# Altium PCB PCB_Clavier.PcbDoc (part 1 of 2)
Units mm, origin at the board's own origin, x right, y up, seen from the top; angles counter-clockwise.
Board outline 291.65 x 101.75 mm, 2 copper layers (Top Layer, Bottom Layer), stack 1.569 mm thick; 306 components, 204 nets, 1059 pads, 0 vias.
Unrouted connection lines stored in the file: 593.
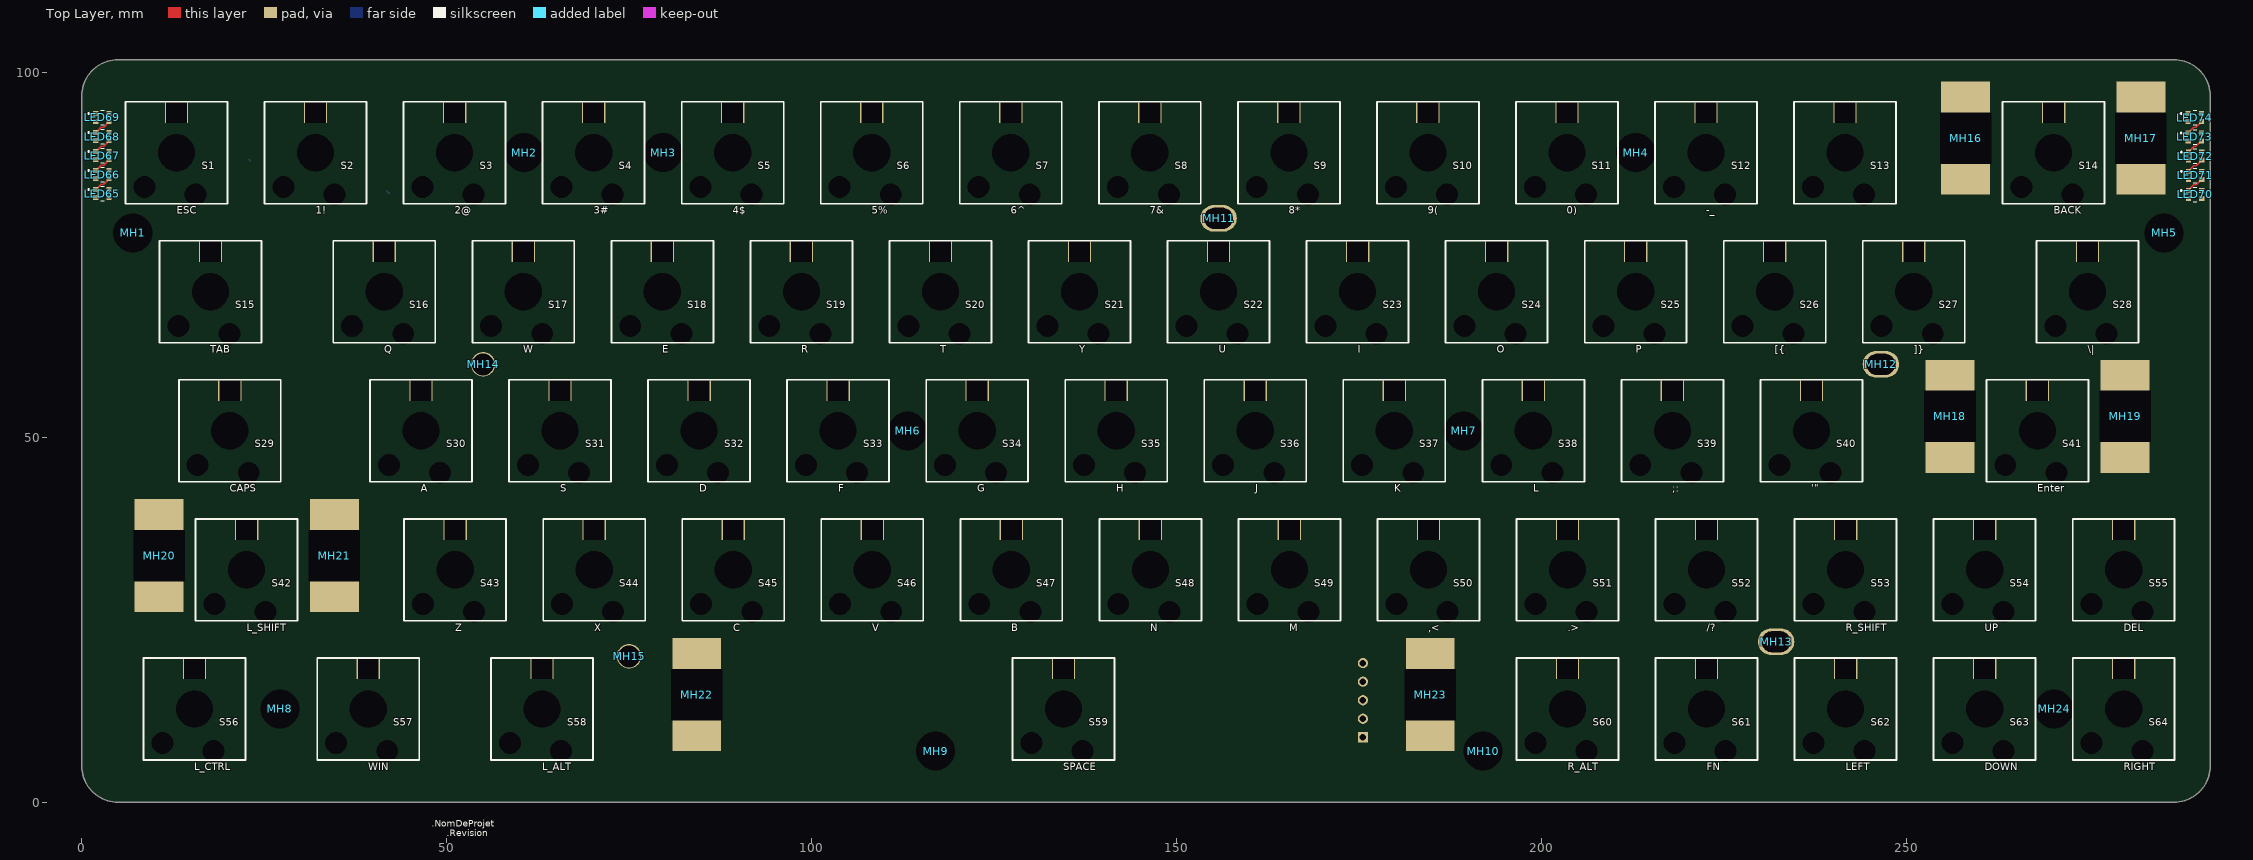
[diagram p0: Top Layer view]
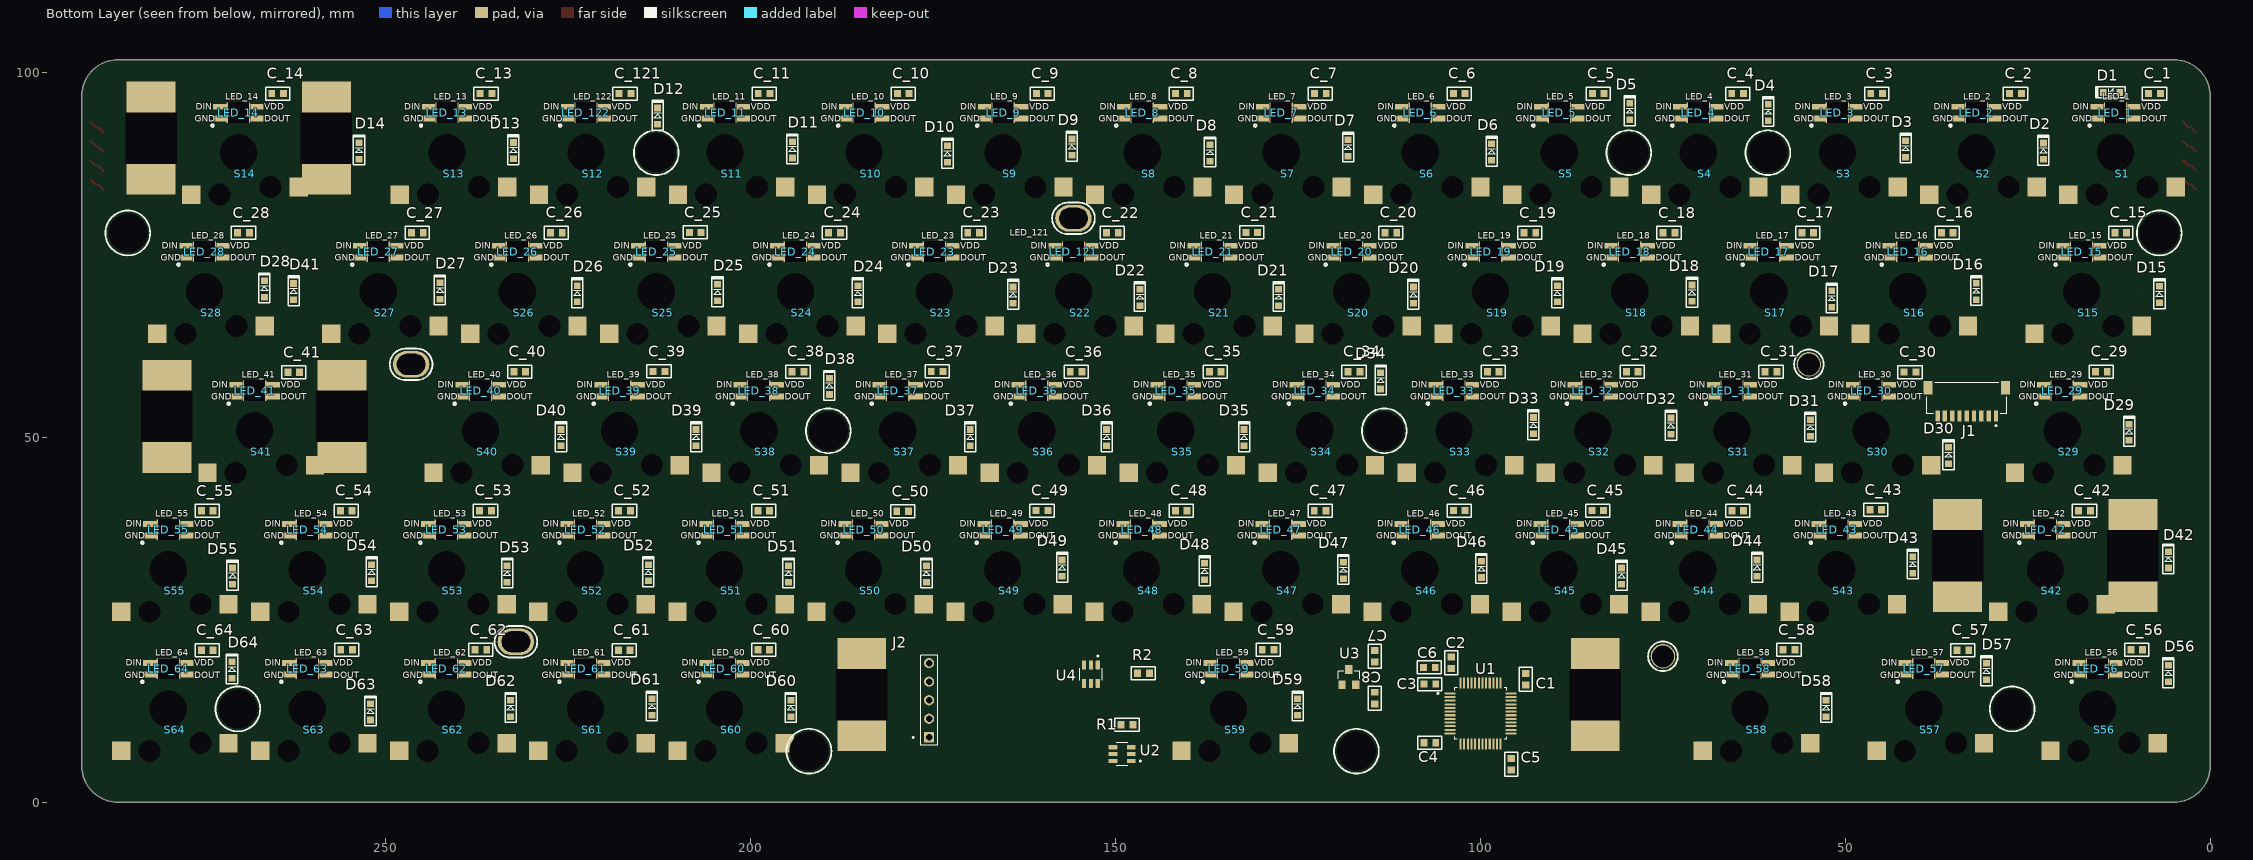
[diagram p1: Bottom Layer view, seen from below]

## Layer stack, top to bottom
Top Solder: solder mask 0.0254, SM-001, Dk 4
Top Layer: signal copper 0.035
Dielectric 1: core 1.4986, Core-043, Dk 4.3
Bottom Layer: signal copper 0.035
Bottom Solder: solder mask 0.0254, SM-001, Dk 4

## Board outline
5,0 cw(c5,5) 0,5 0,96.75 cw(c5,96.75) 5,101.75 286.65,101.75 cw(c286.65,96.75) 291.65,96.75 291.65,5 cw(c286.65,5) 286.65,0

## Design rules (kind name [scope] priority, off if disabled: settings)
BoardOutlineClearance [All] p1: gap=1 ignorepadtopadclearanceinfootprint=FALSE
Clearance [All] p1: gap=0.2 ignorepadtopadclearanceinfootprint=FALSE
DiffPairsRouting [All] p1: maxlimit=0.125 minlimit=0.125 mostfreqgap=0.125 toplayer_minwidth=0.125 toplayer_maxwidth=0.125 toplayer_prefwidth=0.125 bottomlayer_minwidth=0.125 bottomlayer_maxwidth=0.125 bottomlayer_prefwidth=0.125 maxuncoupledlength=15
HoleSize [All] p1: absolutevalues=TRUE maxlimit=5 minlimit=0.2 maxpercent=80.000 minpercent=20.000
HoleToHoleClearance [All] p1: gap=0.3 allowstackedmicrovias=TRUE
MinimumSolderMaskSliver [All] p1: minsoldermaskwidth=0.075
PlaneClearance [All] p1: clearance=0.5
PlaneConnect [All] p1: pad.planeconnectstyle=Relief pad.reliefexpansion=0.508 pad.reliefentries=4 pad.reliefconductorwidth=0.254 pad.reliefairgap=0.254 via.planeconnectstyle=Direct via.reliefexpansion=0.508 via.reliefentries=4 via.reliefconductorwidth=0.254 via.reliefairgap=0.254
PolygonConnect [All] p1: thpad.connectstyle=Relief thpad.reliefconductorwidth=0.254 thpad.reliefentries=4 thpad.polygonreliefangle="90 Angle" thpad.airgapwidth=0.254 smdpad.connectstyle=Relief smdpad.reliefconductorwidth=0.254 smdpad.reliefentries=4 smdpad.polygonreliefangle="90 Angle" smdpad.airgapwidth=0.254 via.connectstyle=Direct via.reliefconductorwidth=0.254 via.reliefentries=4 via.polygonreliefangle="90 Angle" via.airgapwidth=0.254
RoutingVias [All] p1: holewidth=0.3 width=0.8 viastyle="Through Hole" minholewidth=0.2 minwidth=0.6 maxholewidth=0.7 maxwidth=1.2
SilkToSilkClearance [All] p1: silktosilkclearance=0
SilkToSolderMaskClearance [IsPad] p1: minsilkscreentomaskgap=0 clearancetoexposedcopper=TRUE
SolderMaskExpansion [All] p1: expansion=0.102 istentingtop=FALSE
SupplyNets "Schematic Supply Nets_2" [InNet('GND')] p1: voltage=0.000
SupplyNets "Schematic Supply Nets_1" [InNet('VBUS')] p2: voltage=0.000
SupplyNets "Schematic Supply Nets" [InNet('+3.3V')] p3: voltage=0.000
Width [All] p1: maxlimit=5 minlimit=0.15 preferedwidth=0.2
22 further rules are at their usual default settings.

## Classes and differential pairs
component class U_LEDS_Status: LED65 LED66 LED67 LED68 LED69 LED70 LED71 LED72 LED73 LED74
component class 121: C_121 LED_121
component class 64: C_64 LED_64
component class 62: C_62 LED_62
component class 55: C_55 LED_55
component class 53: C_53 LED_53
component class 51: C_51 LED_51
component class 49: C_49 LED_49
component class 47: C_47 LED_47
component class 46: C_46 LED_46
component class 45: C_45 LED_45
component class 44: C_44 LED_44
component class 43: C_43 LED_43
component class 42: C_42 LED_42
component class 37: C_37 LED_37
component class 35: C_35 LED_35
component class 33: C_33 LED_33
component class 32: C_32 LED_32
component class 31: C_31 LED_31
component class 30: C_30 LED_30
component class 29: C_29 LED_29
component class 28: C_28 LED_28
component class 27: C_27 LED_27
component class 25: C_25 LED_25
component class 24: C_24 LED_24
component class 23: C_23 LED_23
component class 21: C_21 LED_21
component class 17: C_17 LED_17
component class 15: C_15 LED_15
component class 13: C_13 LED_13
component class 11: C_11 LED_11
component class 10: C_10 LED_10
component class 9: C_9 LED_9
component class 8: C_8 LED_8
component class 7: C_7 LED_7
component class 6: C_6 LED_6
component class 5: C_5 LED_5
component class 4: C_4 LED_4
component class 3: C_3 LED_3
component class 1: C_1 LED_1
channel class LED_Channel: 1 2 3 4 5 6 7 8 9 10 11 13 14 15 16 17 18 19 20 21 23 24 25 26 27 28 29 30 31 32 33 34 35 36 37 38 39 40 41 42 43 44 45 46 47 48 49 50 51 52 53 54 55 56 57 58 59 60 61 62 63 64 121 122
component class U_Mounting_Holes: MH1 MH2 MH3 MH4 MH5 MH6 MH7 MH8 MH9 MH10 MH11 MH12 MH13 MH14 MH15 MH16 MH17 MH18 MH19 MH20 MH21 MH22 MH23 MH24
component class U_MCU: C1 C2 C3 C4 C5 C6 C7 C8 J1 J2 R1 R2 U1 U2 U3 U4
component class U_Matrice: D1 D2 D3 D4 D5 D6 D7 D8 D9 D10 D11 D12 D13 D14 D15 D16 D17 D18 D19 D20 D21 D22 D23 D24 D25 D26 D27 D28 D29 D30 D31 D32 D33 D34 D35 D36 D37 D38 D39 D40 D41 D42 D43 D44 D45 D46 D47 D48 D49 D50 D51 D52 D53 D54 D55 D56 D57 D58 D59 D60 D61 D62 D63 D64 S1 S2 S3 S4 S5 S6 S7 S8 S9 S10 S11 S12 S13 S14 S15 S16 S17 S18 S19 S20 S21 S22 S23 S24 S25 S26 S27 S28 S29 S30 S31 S32 S33 S34 S35 S36 S37 S38 S39 S40 S41 S42 S43 S44 S45 S46 S47 S48 S49 S50 S51 S52 S53 S54 S55 S56 S57 S58 S59 S60 S61 S62 S63 S64
component class 18: C_18 LED_18
component class 48: C_48 LED_48
component class 41: C_41 LED_41
component class 26: C_26 LED_26
component class 19: C_19 LED_19
component class 14: C_14 LED_14
component class 40: C_40 LED_40
component class 61: C_61 LED_61
component class 50: C_50 LED_50
component class 39: C_39 LED_39
component class 60: C_60 LED_60
component class 57: C_57 LED_57
component class 16: C_16 LED_16
component class 59: C_59 LED_59
component class 52: C_52 LED_52
component class 63: C_63 LED_63
component class 58: C_58 LED_58
component class 36: C_36 LED_36
component class 54: C_54 LED_54
component class 38: C_38 LED_38
component class 56: C_56 LED_56
component class 20: C_20 LED_20
component class 34: C_34 LED_34
component class 122: C_22 LED_122
component class 2: C_2 LED_2
differential pair USBD: +USBD_- -USBD_+

## Components (designator, comment, footprint, x,y, rotation, side; value= is the part's Value field where it differs from the comment)
C1 "100nF" 0603-CAPS 93.8,16.85 r90 bottom
C2 "100nF" 0603-CAPS 104,19.125 r90 bottom
C3 "100nF" 0603-CAPS 106.925,16.2 r0 bottom
C4 "100nF" 0603-CAPS 106.925,8.175 r0 bottom
C5 "100nF" 0603-CAPS 95.8,5.225 r270 bottom
C6 "10uF" 0603-CAPS 107,18.475 r0 bottom
C7 "1uF" 0603-CAPS 114.475,20.025 r90 bottom
C8 "1uF" 0603-CAPS 114.5,14.275 r270 bottom
C_1 "100nF" 0603-CAPS 7.65,97.1 r180 bottom (schematic designator C)
C_2 "100nF" 0603-CAPS 26.7,97.1 r180 bottom (schematic designator C)
C_3 "100nF" 0603-CAPS 45.725,97.1 r180 bottom (schematic designator C)
C_4 "100nF" 0603-CAPS 64.775,97.1 r180 bottom (schematic designator C)
C_5 "100nF" 0603-CAPS 83.85,97.1 r180 bottom (schematic designator C)
C_6 "100nF" 0603-CAPS 102.925,97.1 r180 bottom (schematic designator C)
C_7 "100nF" 0603-CAPS 121.925,97.1 r180 bottom (schematic designator C)
C_8 "100nF" 0603-CAPS 140.975,97.1 r180 bottom (schematic designator C)
C_9 "100nF" 0603-CAPS 160.05,97.1 r180 bottom (schematic designator C)
C_10 "100nF" 0603-CAPS 179.075,97.1 r180 bottom (schematic designator C)
C_11 "100nF" 0603-CAPS 198.15,97.1 r180 bottom (schematic designator C)
C_13 "100nF" 0603-CAPS 236.25,97.1 r180 bottom (schematic designator C)
C_14 "100nF" 0603-CAPS 264.8,97.1 r180 bottom (schematic designator C)
C_15 "100nF" 0603-CAPS 12.275,78.05 r180 bottom (schematic designator C)
C_16 "100nF" 0603-CAPS 36.05,78.05 r180 bottom (schematic designator C)
C_17 "100nF" 0603-CAPS 55.15,78.05 r180 bottom (schematic designator C)
C_18 "100nF" 0603-CAPS 74.175,78.025 r180 bottom (schematic designator C)
C_19 "100nF" 0603-CAPS 93.225,78.025 r180 bottom (schematic designator C)
C_20 "100nF" 0603-CAPS 112.275,78.05 r180 bottom (schematic designator C)
C_21 "100nF" 0603-CAPS 131.35,78.075 r180 bottom (schematic designator C)
C_22 "100nF" 0603-CAPS 150.425,78.025 r180 bottom (schematic designator C)
C_23 "100nF" 0603-CAPS 169.45,78.05 r180 bottom (schematic designator C)
C_24 "100nF" 0603-CAPS 188.5,78.05 r180 bottom (schematic designator C)
C_25 "100nF" 0603-CAPS 207.575,78.075 r180 bottom (schematic designator C)
C_26 "100nF" 0603-CAPS 226.6,78.05 r180 bottom (schematic designator C)
C_27 "100nF" 0603-CAPS 245.65,78.025 r180 bottom (schematic designator C)
C_28 "100nF" 0603-CAPS 269.475,78.025 r180 bottom (schematic designator C)
C_29 "100nF" 0603-CAPS 14.925,59 r180 bottom (schematic designator C)
C_30 "100nF" 0603-CAPS 41.15,58.95 r180 bottom (schematic designator C)
C_31 "100nF" 0603-CAPS 60.2,59 r180 bottom (schematic designator C)
C_32 "100nF" 0603-CAPS 79.2,59 r180 bottom (schematic designator C)
C_33 "100nF" 0603-CAPS 98.25,59 r180 bottom (schematic designator C)
C_34 "100nF" 0603-CAPS 117.325,59 r180 bottom (schematic designator C)
C_35 "100nF" 0603-CAPS 136.35,59 r180 bottom (schematic designator C)
C_36 "100nF" 0603-CAPS 155.4,58.975 r180 bottom (schematic designator C)
C_37 "100nF" 0603-CAPS 174.45,59.025 r180 bottom (schematic designator C)
C_38 "100nF" 0603-CAPS 193.5,59 r180 bottom (schematic designator C)
C_39 "100nF" 0603-CAPS 212.55,59.025 r180 bottom (schematic designator C)
C_40 "100nF" 0603-CAPS 231.625,59 r180 bottom (schematic designator C)
C_41 "100nF" 0603-CAPS 262.575,58.925 r180 bottom (schematic designator C)
C_42 "100nF" 0603-CAPS 17.25,39.95 r180 bottom (schematic designator C)
C_43 "100nF" 0603-CAPS 45.85,40.075 r180 bottom (schematic designator C)
C_44 "100nF" 0603-CAPS 64.75,39.95 r180 bottom (schematic designator C)
C_45 "100nF" 0603-CAPS 83.925,39.975 r180 bottom (schematic designator C)
C_46 "100nF" 0603-CAPS 102.925,39.975 r180 bottom (schematic designator C)
C_47 "100nF" 0603-CAPS 121.975,39.95 r180 bottom (schematic designator C)
C_48 "100nF" 0603-CAPS 141,39.95 r180 bottom (schematic designator C)
C_49 "100nF" 0603-CAPS 160.075,39.975 r180 bottom (schematic designator C)
C_50 "100nF" 0603-CAPS 179.175,39.875 r180 bottom (schematic designator C)
C_51 "100nF" 0603-CAPS 198.2,39.95 r180 bottom (schematic designator C)
C_52 "100nF" 0603-CAPS 217.275,39.95 r180 bottom (schematic designator C)
C_53 "100nF" 0603-CAPS 236.325,39.95 r180 bottom (schematic designator C)
C_54 "100nF" 0603-CAPS 255.4,39.95 r180 bottom (schematic designator C)
C_55 "100nF" 0603-CAPS 274.425,39.925 r180 bottom (schematic designator C)
C_56 "100nF" 0603-CAPS 10.075,20.9 r180 bottom (schematic designator C)
C_57 "100nF" 0603-CAPS 33.9,20.85 r180 bottom (schematic designator C)
C_58 "100nF" 0603-CAPS 57.725,20.9 r180 bottom (schematic designator C)
C_59 "100nF" 0603-CAPS 129.1,20.9 r180 bottom (schematic designator C)
C_60 "100nF" 0603-CAPS 198.2,20.9 r180 bottom (schematic designator C)
C_61 "100nF" 0603-CAPS 217.3,20.85 r180 bottom (schematic designator C)
C_62 "100nF" 0603-CAPS 236.95,20.9 r180 bottom (schematic designator C)
C_63 "100nF" 0603-CAPS 255.35,20.9 r180 bottom (schematic designator C)
C_64 "100nF" 0603-CAPS 274.425,20.85 r180 bottom (schematic designator C)
C_121 "100nF" 0603-CAPS 217.2,97.1 r180 bottom (schematic designator C)
D1 "1N4148W" 1N4148W(SOD123) 13.55,97.275 r0 bottom
D2 "1N4148W" 1N4148W(SOD123) 22.875,89.2 r90 bottom
D3 "1N4148W" 1N4148W(SOD123) 41.75,89.5 r90 bottom
D4 "1N4148W" 1N4148W(SOD123) 60.575,94.5 r90 bottom
D5 "1N4148W" 1N4148W(SOD123) 79.55,94.625 r90 bottom
D6 "1N4148W" 1N4148W(SOD123) 98.475,89.075 r90 bottom
D7 "1N4148W" 1N4148W(SOD123) 118.125,89.65 r90 bottom
D8 "1N4148W" 1N4148W(SOD123) 137.05,88.975 r90 bottom
D9 "1N4148W" 1N4148W(SOD123) 155.975,89.75 r90 bottom
D10 "1N4148W" 1N4148W(SOD123) 173.025,88.8 r90 bottom
D11 "1N4148W" 1N4148W(SOD123) 194.275,89.4 r90 bottom
D12 "1N4148W" 1N4148W(SOD123) 212.725,94 r90 bottom
D13 "1N4148W" 1N4148W(SOD123) 232.5,89.275 r90 bottom
D14 "1N4148W" 1N4148W(SOD123) 253.65,89.25 r90 bottom
D15 "1N4148W" 1N4148W(SOD123) 6.975,69.55 r90 bottom
D16 "1N4148W" 1N4148W(SOD123) 32.075,69.975 r90 bottom
D17 "1N4148W" 1N4148W(SOD123) 51.875,68.95 r90 bottom
D18 "1N4148W" 1N4148W(SOD123) 71.025,69.75 r90 bottom
D19 "1N4148W" 1N4148W(SOD123) 89.45,69.675 r90 bottom
D20 "1N4148W" 1N4148W(SOD123) 109.2,69.475 r90 bottom
D21 "1N4148W" 1N4148W(SOD123) 127.65,69.15 r90 bottom
D22 "1N4148W" 1N4148W(SOD123) 146.675,69.15 r90 bottom
D23 "1N4148W" 1N4148W(SOD123) 164.025,69.475 r90 bottom
D24 "1N4148W" 1N4148W(SOD123) 185.3,69.675 r90 bottom
D25 "1N4148W" 1N4148W(SOD123) 204.525,69.825 r90 bottom
D26 "1N4148W" 1N4148W(SOD123) 223.75,69.675 r90 bottom
D27 "1N4148W" 1N4148W(SOD123) 242.575,70.075 r90 bottom
D28 "1N4148W" 1N4148W(SOD123) 266.625,70.35 r90 bottom
D29 "1N4148W" 1N4148W(SOD123) 11.125,50.7 r90 bottom
D30 "1N4148W" 1N4148W(SOD123) 35.875,47.5 r90 bottom
D31 "1N4148W" 1N4148W(SOD123) 54.8,51.275 r90 bottom
D32 "1N4148W" 1N4148W(SOD123) 73.9,51.525 r90 bottom
D33 "1N4148W" 1N4148W(SOD123) 92.75,51.6 r90 bottom
D34 "1N4148W" 1N4148W(SOD123) 113.675,57.75 r90 bottom
D35 "1N4148W" 1N4148W(SOD123) 132.375,49.95 r90 bottom
D36 "1N4148W" 1N4148W(SOD123) 151.225,49.95 r90 bottom
D37 "1N4148W" 1N4148W(SOD123) 169.9,49.95 r90 bottom
D38 "1N4148W" 1N4148W(SOD123) 189.2,57 r90 bottom
D39 "1N4148W" 1N4148W(SOD123) 207.45,49.95 r90 bottom
D40 "1N4148W" 1N4148W(SOD123) 225.975,49.95 r90 bottom
D41 "1N4148W" 1N4148W(SOD123) 262.6,69.95 r90 bottom locked
D42 "1N4148W" 1N4148W(SOD123) 5.75,33.225 r90 bottom
D43 "1N4148W" 1N4148W(SOD123) 40.775,32.5 r90 bottom
D44 "1N4148W" 1N4148W(SOD123) 62.1,32.075 r90 bottom
D45 "1N4148W" 1N4148W(SOD123) 80.675,30.975 r90 bottom
D46 "1N4148W" 1N4148W(SOD123) 99.875,31.925 r90 bottom
D47 "1N4148W" 1N4148W(SOD123) 118.775,31.775 r90 bottom
D48 "1N4148W" 1N4148W(SOD123) 137.8,31.6 r90 bottom
D49 "1N4148W" 1N4148W(SOD123) 157.325,32.075 r90 bottom
D50 "1N4148W" 1N4148W(SOD123) 175.9,31.3 r90 bottom
D51 "1N4148W" 1N4148W(SOD123) 194.8,31.3 r90 bottom
D52 "1N4148W" 1N4148W(SOD123) 214,31.45 r90 bottom
D53 "1N4148W" 1N4148W(SOD123) 233.35,31.3 r90 bottom
D54 "1N4148W" 1N4148W(SOD123) 251.925,31.45 r90 bottom
D55 "1N4148W" 1N4148W(SOD123) 270.975,30.975 r90 bottom
D56 "1N4148W" 1N4148W(SOD123) 5.75,17.625 r90 bottom
D57 "1N4148W" 1N4148W(SOD123) 30.675,17.9 r90 bottom
D58 "1N4148W" 1N4148W(SOD123) 52.65,12.875 r90 bottom
D59 "1N4148W" 1N4148W(SOD123) 125.05,13.05 r90 bottom
D60 "1N4148W" 1N4148W(SOD123) 194.475,12.875 r90 bottom
D61 "1N4148W" 1N4148W(SOD123) 213.525,13.05 r90 bottom
D62 "1N4148W" 1N4148W(SOD123) 232.875,12.875 r90 bottom
D63 "1N4148W" 1N4148W(SOD123) 252.075,12.4 r90 bottom
D64 "1N4148W" 1N4148W(SOD123) 271.05,18.15 r90 bottom
J1 "SM09B-SRSS-TB(LF)(SN)" JST_SM09B-SRSS-TB(LF)(SN) 33.375,56.8 r0 bottom
J2 "Prog" TE_5-146280-5 175.55,13.985 r90 bottom
LED65 "WS2812-2020" LED_WS2812-2020 2.85,83.4 r180 top
LED66 "WS2812-2020" LED_WS2812-2020 2.85,86 r180 top
LED67 "WS2812-2020" LED_WS2812-2020 2.85,88.6 r180 top
LED68 "WS2812-2020" LED_WS2812-2020 2.85,91.2 r180 top
LED69 "WS2812-2020" LED_WS2812-2020 2.85,93.825 r180 top
LED70 "WS2812-2020" LED_WS2812-2020 289.55,83.275 r180 top
LED71 "WS2812-2020" LED_WS2812-2020 289.55,85.9 r180 top
LED72 "WS2812-2020" LED_WS2812-2020 289.55,88.525 r180 top
LED73 "WS2812-2020" LED_WS2812-2020 289.54,91.175 r180 top
LED74 "WS2812-2020" LED_WS2812-2020 289.525,93.8 r180 top
LED_1 "SK6803 Mini-E" SK6812_LED 13,94.5 r0 top locked (schematic designator LED)
LED_2 "SK6803 Mini-E" SK6812_LED 32.05,94.5 r0 top locked (schematic designator LED)
LED_3 "SK6803 Mini-E" SK6812_LED 51.1,94.5 r0 top locked (schematic designator LED)
LED_4 "SK6803 Mini-E" SK6812_LED 70.15,94.5 r0 top locked (schematic designator LED)
LED_5 "SK6803 Mini-E" SK6812_LED 89.2,94.5 r0 top locked (schematic designator LED)
LED_6 "SK6803 Mini-E" SK6812_LED 108.25,94.5 r0 top locked (schematic designator LED)
LED_7 "SK6803 Mini-E" SK6812_LED 127.3,94.5 r0 top locked (schematic designator LED)
LED_8 "SK6803 Mini-E" SK6812_LED 146.35,94.5 r0 top locked (schematic designator LED)
LED_9 "SK6803 Mini-E" SK6812_LED 165.4,94.5 r0 top locked (schematic designator LED)
LED_10 "SK6803 Mini-E" SK6812_LED 184.45,94.5 r0 top locked (schematic designator LED)
LED_11 "SK6803 Mini-E" SK6812_LED 203.5,94.5 r0 top locked (schematic designator LED)
LED_13 "SK6803 Mini-E" SK6812_LED 241.6,94.5 r0 top locked (schematic designator LED)
LED_14 "SK6803 Mini-E" SK6812_LED 270.175,94.5 r0 top locked (schematic designator LED)
LED_15 "SK6803 Mini-E" SK6812_LED 17.65,75.45 r0 top locked (schematic designator LED)
LED_16 "SK6803 Mini-E" SK6812_LED 41.463,75.45 r0 top locked (schematic designator LED)
LED_17 "SK6803 Mini-E" SK6812_LED 60.513,75.45 r0 top locked (schematic designator LED)
LED_18 "SK6803 Mini-E" SK6812_LED 79.563,75.45 r0 top locked (schematic designator LED)
LED_19 "SK6803 Mini-E" SK6812_LED 98.613,75.45 r0 top locked (schematic designator LED)
LED_20 "SK6803 Mini-E" SK6812_LED 117.663,75.45 r0 top locked (schematic designator LED)
LED_21 "SK6803 Mini-E" SK6812_LED 136.713,75.45 r0 top locked (schematic designator LED)
LED_23 "SK6803 Mini-E" SK6812_LED 174.813,75.45 r0 top locked (schematic designator LED)
LED_24 "SK6803 Mini-E" SK6812_LED 193.863,75.45 r0 top locked (schematic designator LED)
LED_25 "SK6803 Mini-E" SK6812_LED 212.913,75.45 r0 top locked (schematic designator LED)
LED_26 "SK6803 Mini-E" SK6812_LED 231.963,75.45 r0 top locked (schematic designator LED)
LED_27 "SK6803 Mini-E" SK6812_LED 251.013,75.45 r0 top locked (schematic designator LED)
LED_28 "SK6803 Mini-E" SK6812_LED 274.825,75.45 r0 top locked (schematic designator LED)
LED_29 "SK6803 Mini-E" SK6812_LED 20.3,56.4 r0 top locked (schematic designator LED)
LED_30 "SK6803 Mini-E" SK6812_LED 46.494,56.4 r0 top locked (schematic designator LED)
LED_31 "SK6803 Mini-E" SK6812_LED 65.544,56.4 r0 top locked (schematic designator LED)
LED_32 "SK6803 Mini-E" SK6812_LED 84.594,56.4 r0 top locked (schematic designator LED)
LED_33 "SK6803 Mini-E" SK6812_LED 103.644,56.4 r0 top locked (schematic designator LED)
LED_34 "SK6803 Mini-E" SK6812_LED 122.694,56.4 r0 top locked (schematic designator LED)
LED_35 "SK6803 Mini-E" SK6812_LED 141.744,56.4 r0 top locked (schematic designator LED)
LED_36 "SK6803 Mini-E" SK6812_LED 160.794,56.4 r0 top locked (schematic designator LED)
LED_37 "SK6803 Mini-E" SK6812_LED 179.844,56.4 r0 top locked (schematic designator LED)
LED_38 "SK6803 Mini-E" SK6812_LED 198.894,56.4 r0 top locked (schematic designator LED)
LED_39 "SK6803 Mini-E" SK6812_LED 217.944,56.4 r0 top locked (schematic designator LED)
LED_40 "SK6803 Mini-E" SK6812_LED 236.994,56.4 r0 top locked (schematic designator LED)
LED_41 "SK6803 Mini-E" SK6812_LED 267.95,56.4 r0 top locked (schematic designator LED)
LED_42 "SK6803 Mini-E" SK6812_LED 22.6,37.35 r0 top locked (schematic designator LED)
LED_43 "SK6803 Mini-E" SK6812_LED 51.175,37.35 r0 top locked (schematic designator LED)
LED_44 "SK6803 Mini-E" SK6812_LED 70.225,37.35 r0 top locked (schematic designator LED)
LED_45 "SK6803 Mini-E" SK6812_LED 89.275,37.35 r0 top locked (schematic designator LED)
LED_46 "SK6803 Mini-E" SK6812_LED 108.325,37.35 r0 top locked (schematic designator LED)
LED_47 "SK6803 Mini-E" SK6812_LED 127.375,37.35 r0 top locked (schematic designator LED)
LED_48 "SK6803 Mini-E" SK6812_LED 146.425,37.35 r0 top locked (schematic designator LED)
LED_49 "SK6803 Mini-E" SK6812_LED 165.475,37.35 r0 top locked (schematic designator LED)
LED_50 "SK6803 Mini-E" SK6812_LED 184.525,37.35 r0 top locked (schematic designator LED)
LED_51 "SK6803 Mini-E" SK6812_LED 203.575,37.35 r0 top locked (schematic designator LED)
LED_52 "SK6803 Mini-E" SK6812_LED 222.625,37.35 r0 top locked (schematic designator LED)
LED_53 "SK6803 Mini-E" SK6812_LED 241.675,37.35 r0 top locked (schematic designator LED)
LED_54 "SK6803 Mini-E" SK6812_LED 260.725,37.35 r0 top locked (schematic designator LED)
LED_55 "SK6803 Mini-E" SK6812_LED 279.775,37.35 r0 top locked (schematic designator LED)
LED_56 "SK6803 Mini-E" SK6812_LED 15.456,18.3 r0 top locked (schematic designator LED)
LED_57 "SK6803 Mini-E" SK6812_LED 39.269,18.3 r0 top locked (schematic designator LED)
LED_58 "SK6803 Mini-E" SK6812_LED 63.081,18.3 r0 top locked (schematic designator LED)
LED_59 "SK6803 Mini-E" SK6812_LED 134.519,18.3 r0 top locked (schematic designator LED)
LED_60 "SK6803 Mini-E" SK6812_LED 203.575,18.3 r0 top locked (schematic designator LED)
LED_61 "SK6803 Mini-E" SK6812_LED 222.625,18.3 r0 top locked (schematic designator LED)
LED_62 "SK6803 Mini-E" SK6812_LED 241.675,18.3 r0 top locked (schematic designator LED)
LED_63 "SK6803 Mini-E" SK6812_LED 260.725,18.3 r0 top locked (schematic designator LED)
LED_64 "SK6803 Mini-E" SK6812_LED 279.775,18.3 r0 top locked (schematic designator LED)
LED_121 "SK6803 Mini-E" SK6812_LED 155.763,75.45 r0 top locked (schematic designator LED)
LED_122 "SK6803 Mini-E" SK6812_LED 222.55,94.5 r0 top locked (schematic designator LED)
MH1 "5.3mm" MTH_ROUND_5.35D 7,78 r0 top locked
MH2 "5.3mm" MTH_ROUND_5.35D 60.625,89 r0 top locked
MH3 "5.3mm" MTH_ROUND_5.35D 79.675,89 r0 top locked
MH4 "5.3mm" MTH_ROUND_5.35D 212.925,89 r0 top locked
MH5 "5.3mm" MTH_ROUND_5.35D 285.325,78 r0 top locked
MH6 "5.3mm" MTH_ROUND_5.35D 113.175,50.9 r0 top locked
MH7 "5.3mm" MTH_ROUND_5.35D 189.35,50.9 r0 top locked
MH8 "5.3mm" MTH_ROUND_5.35D 27.15,12.8 r0 top locked
MH9 "5.3mm" MTH_ROUND_5.35D 117,7 r0 top locked
MH10 "5.3mm" MTH_ROUND_5.35D 192,7 r0 top
MH11 "3.9x2.9mm" MTH_OBLONG_3.9x2.9_PL 155.763,80 r0 top locked
MH12 "3.9x2.9mm" MTH_OBLONG_3.9x2.9_PL 246.51,60 r0 top locked
MH13 "3.9x2.9mm" MTH_OBLONG_3.9x2.9_PL 232.15,22 r0 top locked
MH14 "3mm" MTH_ROUND_3D_PL 55,60 r0 top locked
MH15 "3mm" MTH_ROUND_3D_PL 75,20 r0 top locked
MH16 "Stabilizer" STABILIZERS 258.125,91 r90 top locked
MH17 "Stabilizer" STABILIZERS 282.125,91 r90 top locked
MH18 "Stabilizer" STABILIZERS 255.975,52.875 r90 top locked
MH19 "Stabilizer" STABILIZERS 279.975,52.875 r90 top locked
MH20 "Stabilizer" STABILIZERS 10.625,33.8 r90 top locked
MH21 "Stabilizer" STABILIZERS 34.625,33.8 r90 top locked
MH22 "Stabilizer" STABILIZERS 84.269,14.75 r90 top locked
MH23 "Stabilizer" STABILIZERS 184.769,14.75 r90 top locked
MH24 "5.3mm" MTH_ROUND_5.35D 270.25,12.8 r0 top locked
R1 "500" 0603-CAPS 148.425,10.625 r0 bottom
R2 "500" 0603-CAPS 146.175,17.675 r180 bottom
S1 "ESC" GATERON_LOWPROFILE_HOTSWAP_SOCKET 13,89 r0 top locked
S2 "1!" GATERON_LOWPROFILE_HOTSWAP_SOCKET 32.05,89 r0 top locked
S3 "2@" GATERON_LOWPROFILE_HOTSWAP_SOCKET 51.1,89 r0 top locked
S4 "3#" GATERON_LOWPROFILE_HOTSWAP_SOCKET 70.15,89 r0 top locked
S5 "4$" GATERON_LOWPROFILE_HOTSWAP_SOCKET 89.2,89 r0 top locked
S6 "5%" GATERON_LOWPROFILE_HOTSWAP_SOCKET 108.25,89 r0 top locked
S7 "6^" GATERON_LOWPROFILE_HOTSWAP_SOCKET 127.3,89 r0 top locked
S8 "7&" GATERON_LOWPROFILE_HOTSWAP_SOCKET 146.35,89 r0 top locked
S9 "8*" GATERON_LOWPROFILE_HOTSWAP_SOCKET 165.4,89 r0 top locked
S10 "9(" GATERON_LOWPROFILE_HOTSWAP_SOCKET 184.45,89 r0 top locked
S11 "0)" GATERON_LOWPROFILE_HOTSWAP_SOCKET 203.5,89 r0 top locked
S12 "-_" GATERON_LOWPROFILE_HOTSWAP_SOCKET 222.55,89 r0 top locked
S13 "" GATERON_LOWPROFILE_HOTSWAP_SOCKET 241.6,89 r0 top locked
S14 "BACK" GATERON_LOWPROFILE_HOTSWAP_SOCKET 270.175,89 r0 top locked
S15 "TAB" GATERON_LOWPROFILE_HOTSWAP_SOCKET 17.65,69.95 r0 top locked
S16 "Q" GATERON_LOWPROFILE_HOTSWAP_SOCKET 41.463,69.95 r0 top locked
S17 "W" GATERON_LOWPROFILE_HOTSWAP_SOCKET 60.513,69.95 r0 top locked
S18 "E" GATERON_LOWPROFILE_HOTSWAP_SOCKET 79.563,69.95 r0 top locked
S19 "R" GATERON_LOWPROFILE_HOTSWAP_SOCKET 98.613,69.95 r0 top locked
S20 "T" GATERON_LOWPROFILE_HOTSWAP_SOCKET 117.663,69.95 r0 top locked
S21 "Y" GATERON_LOWPROFILE_HOTSWAP_SOCKET 136.713,69.95 r0 top locked
S22 "U" GATERON_LOWPROFILE_HOTSWAP_SOCKET 155.763,69.95 r0 top locked
S23 "I" GATERON_LOWPROFILE_HOTSWAP_SOCKET 174.813,69.95 r0 top locked
S24 "O" GATERON_LOWPROFILE_HOTSWAP_SOCKET 193.863,69.95 r0 top locked
S25 "P" GATERON_LOWPROFILE_HOTSWAP_SOCKET 212.913,69.95 r0 top locked
S26 "[{" GATERON_LOWPROFILE_HOTSWAP_SOCKET 231.963,69.95 r0 top locked
S27 "]}" GATERON_LOWPROFILE_HOTSWAP_SOCKET 251.013,69.95 r0 top locked
S28 "\|" GATERON_LOWPROFILE_HOTSWAP_SOCKET 274.825,69.95 r0 top locked
S29 "CAPS" GATERON_LOWPROFILE_HOTSWAP_SOCKET 20.3,50.9 r0 top locked
S30 "A" GATERON_LOWPROFILE_HOTSWAP_SOCKET 46.494,50.9 r0 top locked
S31 "S" GATERON_LOWPROFILE_HOTSWAP_SOCKET 65.544,50.9 r0 top locked
S32 "D" GATERON_LOWPROFILE_HOTSWAP_SOCKET 84.594,50.9 r0 top locked
S33 "F" GATERON_LOWPROFILE_HOTSWAP_SOCKET 103.644,50.9 r0 top locked
S34 "G" GATERON_LOWPROFILE_HOTSWAP_SOCKET 122.694,50.9 r0 top locked
S35 "H" GATERON_LOWPROFILE_HOTSWAP_SOCKET 141.744,50.9 r0 top locked
S36 "J" GATERON_LOWPROFILE_HOTSWAP_SOCKET 160.794,50.9 r0 top locked
S37 "K" GATERON_LOWPROFILE_HOTSWAP_SOCKET 179.844,50.9 r0 top locked
S38 "L" GATERON_LOWPROFILE_HOTSWAP_SOCKET 198.894,50.9 r0 top locked
S39 ";:" GATERON_LOWPROFILE_HOTSWAP_SOCKET 217.944,50.9 r0 top locked
S40 "'\"" GATERON_LOWPROFILE_HOTSWAP_SOCKET 236.994,50.9 r0 top locked
S41 "Enter" GATERON_LOWPROFILE_HOTSWAP_SOCKET 267.95,50.9 r0 top locked
S42 "L_SHIFT" GATERON_LOWPROFILE_HOTSWAP_SOCKET 22.6,31.85 r0 top locked
S43 "Z" GATERON_LOWPROFILE_HOTSWAP_SOCKET 51.175,31.85 r0 top locked
S44 "X" GATERON_LOWPROFILE_HOTSWAP_SOCKET 70.225,31.85 r0 top locked
S45 "C" GATERON_LOWPROFILE_HOTSWAP_SOCKET 89.275,31.85 r0 top locked
S46 "V" GATERON_LOWPROFILE_HOTSWAP_SOCKET 108.325,31.85 r0 top locked
S47 "B" GATERON_LOWPROFILE_HOTSWAP_SOCKET 127.375,31.85 r0 top locked
S48 "N" GATERON_LOWPROFILE_HOTSWAP_SOCKET 146.425,31.85 r0 top locked
S49 "M" GATERON_LOWPROFILE_HOTSWAP_SOCKET 165.475,31.85 r0 top locked
S50 ",<" GATERON_LOWPROFILE_HOTSWAP_SOCKET 184.525,31.85 r0 top locked
S51 ".>" GATERON_LOWPROFILE_HOTSWAP_SOCKET 203.575,31.85 r0 top locked
S52 "/?" GATERON_LOWPROFILE_HOTSWAP_SOCKET 222.625,31.85 r0 top locked
S53 "R_SHIFT" GATERON_LOWPROFILE_HOTSWAP_SOCKET 241.675,31.85 r0 top locked
S54 "UP" GATERON_LOWPROFILE_HOTSWAP_SOCKET 260.725,31.85 r0 top locked
S55 "DEL" GATERON_LOWPROFILE_HOTSWAP_SOCKET 279.775,31.85 r0 top locked
S56 "L_CTRL" GATERON_LOWPROFILE_HOTSWAP_SOCKET 15.456,12.8 r0 top locked
S57 "WIN" GATERON_LOWPROFILE_HOTSWAP_SOCKET 39.269,12.8 r0 top locked
S58 "L_ALT" GATERON_LOWPROFILE_HOTSWAP_SOCKET 63.081,12.8 r0 top locked
S59 "SPACE" GATERON_LOWPROFILE_HOTSWAP_SOCKET 134.519,12.8 r0 top locked
S60 "R_ALT" GATERON_LOWPROFILE_HOTSWAP_SOCKET 203.575,12.8 r0 top locked
S61 "FN" GATERON_LOWPROFILE_HOTSWAP_SOCKET 222.625,12.8 r0 top locked
S62 "LEFT" GATERON_LOWPROFILE_HOTSWAP_SOCKET 241.675,12.8 r0 top locked
S63 "DOWN" GATERON_LOWPROFILE_HOTSWAP_SOCKET 260.725,12.8 r0 top locked
S64 "RIGHT" GATERON_LOWPROFILE_HOTSWAP_SOCKET 279.775,12.8 r0 top locked
U1 "STM32F072CBT6" QFP50P900X900X160-48N 99.98,12.175 r180 bottom
U2 "SN74LVC1T45DBVR" SOT95P280X145-6N 149.1,6.6 r0 bottom
U3 "XC6206P332MR" SOT-23 118.025,17.15 r180 bottom
U4 "SN74LVC1T45DBVR" SOT95P280X145-6N 153.375,17.55 r270 bottom

## Footprints (in the part's own frame and the unit in brackets; to place one, negate y for a bottom-side part, rotate by r counter-clockwise, add the part's x,y. Pads: shape width x height; smd on the part's side, far side on the other; paste and mask are expansions set on the pad)
1N4148W(SOD123) [mm]
  rect 0.9x0.95 smd: 1(-1.125,0) 2(1.125,0)
  silkscreen extent -1.91,-0.76 2.16,0.76
0603-CAPS [mm]
  rect 0.95x1 smd: 1(-0.8,0) 2(0.8,0)
  silkscreen extent -1.65,-0.89 1.65,0.89
GATERON_LOWPROFILE_HOTSWAP_SOCKET [mm]
  round 1.524 hole 3 unplated: 0(-4.4,-4.7) 0(2.6,-5.75)
  round 1.524 hole 5.1 unplated: 0(0,0)
  rect 2.5x2.55 smd far side: 1(-8.255,-4.7) 2(6.455,-5.75)
  silkscreen extent -6.98,-6.98 6.99,6.98, body extent -8.44,-7.93 6.66,-2.54
JST_SM09B-SRSS-TB(LF)(SN) [mm]
  rect 0.6x1.55 smd: 1(-4,3.875) 2(-3,3.875) 3(-2,3.875) 4(-1,3.875) 5(0,3.875) 6(1,3.875) 7(2,3.875) 8(3,3.875) 9(4,3.875)
  rect 1.2x1.8 smd: S1(-5.3,0) S2(5.3,0)
  silkscreen extent -5.5,-0.7 5.5,5.3, body extent -3.5,-3.9 7.5,1.05, height 3.25
LED_WS2812-2020 [mm]
  rect 0.7x0.7 smd: 1(0.915,-0.55) 2(0.915,0.55) 3(-0.915,0.55) 4(-0.915,-0.55)
  silkscreen extent -0.25,-1 1.97,1, body extent -1.1,-1 1.1,1, height 0.84
MTH_OBLONG_3.9x2.9_PL [mm]
  oval 5x3.65 hole 2.9 slot 3.9 at 0 deg: 1(0,0)
MTH_ROUND_3D_PL [mm]
  round 3.35 hole 3: 1(0,0)
MTH_ROUND_5.35D [mm]
  round 5 hole 5.35 unplated: 1(0,0)
QFP50P900X900X160-48N [mm]
  rrect25% 1.49x0.28 smd: 1(-4.17,2.75) 2(-4.17,2.25) 3(-4.17,1.75) 4(-4.17,1.25) 5(-4.17,0.75) 6(-4.17,0.25) 7(-4.17,-0.25) 8(-4.17,-0.75) 9(-4.17,-1.25) 10(-4.17,-1.75) 11(-4.17,-2.25) 12(-4.17,-2.75) 25(4.17,-2.75) 26(4.17,-2.25) 27(4.17,-1.75) 28(4.17,-1.25) 29(4.17,-0.75) 30(4.17,-0.25) 31(4.17,0.25) 32(4.17,0.75) 33(4.17,1.25) 34(4.17,1.75) 35(4.17,2.25) 36(4.17,2.75)
  rrect25% 0.28x1.49 smd: 13(-2.75,-4.17) 14(-2.25,-4.17) 15(-1.75,-4.17) 16(-1.25,-4.17) 17(-0.75,-4.17) 18(-0.25,-4.17) 19(0.25,-4.17) 20(0.75,-4.17) 21(1.25,-4.17) 22(1.75,-4.17) 23(2.25,-4.17) 24(2.75,-4.17) 37(2.75,4.17) 38(2.25,4.17) 39(1.75,4.17) 40(1.25,4.17) 41(0.75,4.17) 42(0.25,4.17) 43(-0.25,4.17) 44(-0.75,4.17) 45(-1.25,4.17) 46(-1.75,4.17) 47(-2.25,4.17) 48(-2.75,4.17)
  silkscreen extent -5.96,-3.55 3.55,3.55, body extent -4.5,-4.5 4.5,4.5, height 1.59
SK6812_LED [mm]
  rect 3.2x2.8 / inner round 1.524 / far side rect 3.2x2.8 hole 2.8 square unplated: 0(0,0)
  rect 1.8x0.8 smd far side: 1(2.55,-0.8) 2(2.55,0.8) 3(-2.55,0.8) 4(-2.55,-0.8)
SOT95P280X145-6N [mm]
  rrect25% 1.21x0.58 smd: 1(-1.255,0.95) 2(-1.255,0) 3(-1.255,-0.95) 4(1.255,-0.95) 5(1.255,0) 6(1.255,0.95)
  silkscreen extent -2.6,-1.56 0.8,1.56
SOT-23 [mm]
  rect 1.016x1.2 smd: 1(-0.95,-1.06) 2(0.95,-1.06) 3(0,1.06)
  silkscreen extent -1.46,-0.25 1.46,0.8, body extent -1.4,-1.45 1.4,1.45, height 1.3
STABILIZERS [mm]
  rect 15.5x6.7 hole 7 square unplated: 1(0,0)
TE_5-146280-5 [mm]
  rect 1.398x1.398 / inner round 1.398 / far side rect 1.398x1.398 hole 0.89: 1(-5.08,0)
  round 1.398 hole 0.89: 2(-2.54,0) 3(0,0) 4(2.54,0) 5(5.08,0)
  silkscreen extent -6.15,-1.17 6.15,2.27, body extent -6.15,-5.84 6.15,5.33, height 1.17